# Altium PCB Taban.PcbDoc
Units mm, origin at the board's own origin, x right, y up, seen from the top; angles counter-clockwise.
Board outline 76.2 x 99 mm, 2 copper layers (Top Layer, Bottom Layer), stack 0.98 mm thick; 6 components, 0 nets, 6 pads, 0 vias.
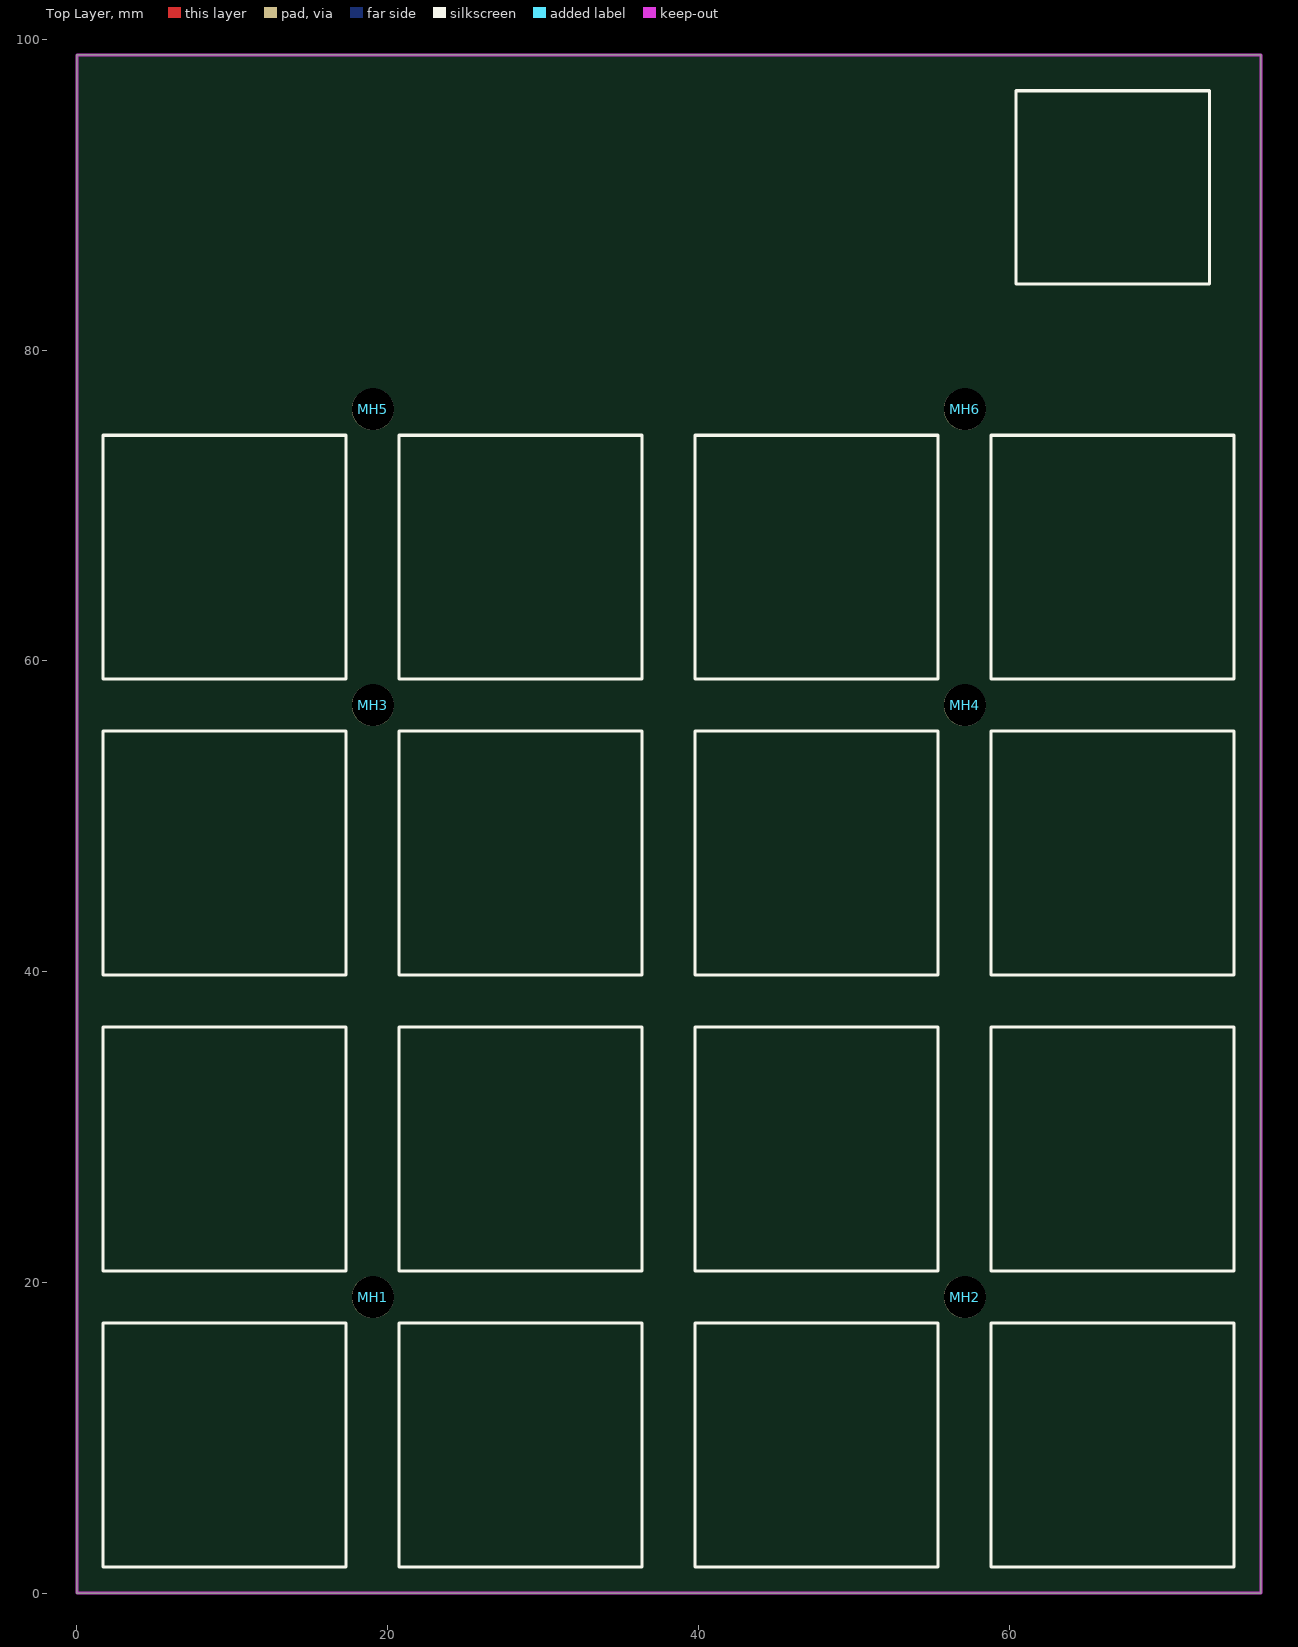
[diagram p0: Top Layer view]
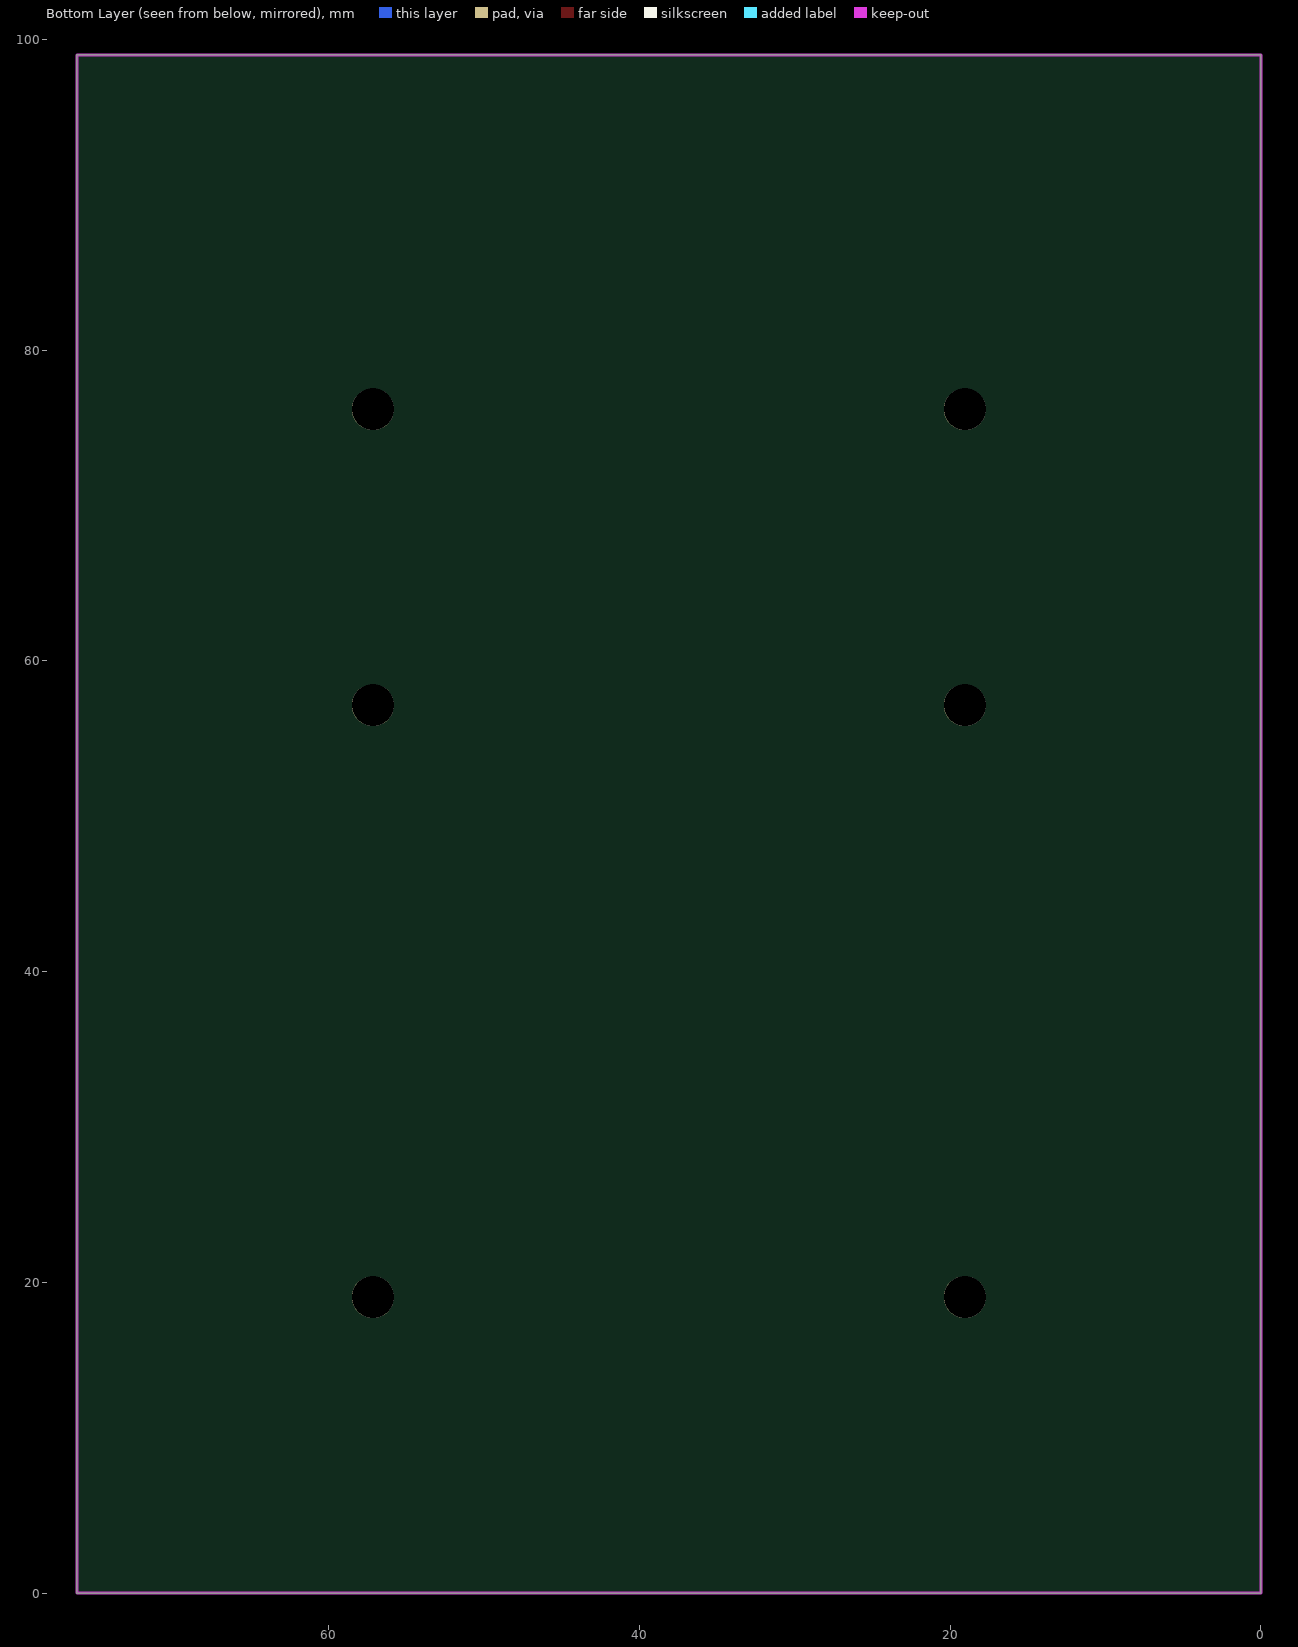
[diagram p1: Bottom Layer view, seen from below]

## Layer stack, top to bottom
Top Solder: solder mask 0.01, Solder Resist, Dk 3.5
Top Layer: signal copper 0.035
Dielectric 1: dielectric 0.91, FR-4, Dk 4.8
Bottom Layer: signal copper 0.035
Bottom Solder: solder mask 0.01, Solder Resist, Dk 3.5

## Board outline
0,0 0,99 76.2,99 76.2,0

## Design rules (kind name [scope] priority, off if disabled: settings)
Clearance [All] p1: gap=0.254 ignorepadtopadclearanceinfootprint=FALSE except(0: Arc-Hole Track-Hole SMDPad-Hole THPad-Hole Via-Hole Fill-Hole Poly-Hole Region-Hole Text-Hole)
PolygonConnect [All] p1: connectstyle=Relief reliefconductorwidth=0.254 reliefentries=4 polygonreliefangle="90 Angle" airgapwidth=0.254
RoutingVias [All] p1: holewidth=0.711 width=1.27 viastyle="Through Hole" minholewidth=0.711 minwidth=1.27 maxholewidth=0.711 maxwidth=1.27
SolderMaskExpansion [All] p1: expansion=0.102 istentingtop=FALSE
Width [All] p1: maxlimit=0.254 minlimit=0.254 preferedwidth=0.254
30 further rules are at their usual default settings.

## Components (designator, comment, footprint, x,y, rotation, side; value= is the part's Value field where it differs from the comment)
MH1 "MOUNTING HOLE" "MH 2.7MM" 19.049,19.05 r0 top
MH2 "MOUNTING HOLE" "MH 2.7MM" 57.149,19.05 r0 top
MH3 "MOUNTING HOLE" "MH 2.7MM" 19.049,57.15 r0 top
MH4 "MOUNTING HOLE" "MH 2.7MM" 57.149,57.15 r0 top
MH5 "MOUNTING HOLE" "MH 2.7MM" 19.049,76.2 r0 top
MH6 "MOUNTING HOLE" "MH 2.7MM" 57.149,76.2 r0 top

## Footprints (in the part's own frame and the unit in brackets; to place one, negate y for a bottom-side part, rotate by r counter-clockwise, add the part's x,y. Pads: shape width x height; smd on the part's side, far side on the other; paste and mask are expansions set on the pad)
"MH 2.7MM" [mm]
  round 2.7 hole 2.7 unplated mask+1.2: ""(0,0)

## Part data
MH1 MH2 MH3 MH4 MH5 MH6: library part MH

## Nets (pads, with @x,y where several pads share a name; then routed paths per layer and width w, separated by ;. In a path a pad name is that pad's centre, name@x,y a point inside that pad or via, vN(x,y) a via of type N, cw(c..) or ccw(c..) an arc to the next point about the centre after c; other vN are vias at no path point)
pads on no net: MH1. MH2. MH3. MH4. MH5. MH6.

## Keep-outs
Keep-Out Layer:
  the board outline again, w0.2

## Silkscreen, mask and mechanical layers (free items; w line width, h text height)
Top Overlay:
  lines w0.2: 1.675,1.675 17.325,1.675 17.325,17.375 1.675,17.375 1.675,1.675 ; 1.675,20.725 1.675,36.425 17.325,36.425 17.325,20.725 1.675,20.725 ; 1.675,39.775 1.675,55.475 17.325,55.475 17.325,39.775 1.675,39.775 ; 1.675,58.825 1.675,74.525 17.325,74.525 17.325,58.825 1.675,58.825 ; 20.725,1.675 20.725,17.375 36.375,17.375 36.375,1.675 20.725,1.675 ; 20.725,20.725 36.375,20.725 36.375,36.425 20.725,36.425 20.725,20.725 ; 20.725,39.775 36.375,39.775 36.375,55.475 20.725,55.475 20.725,39.775 ; 20.725,58.825 36.375,58.825 36.375,74.525 20.725,74.525 20.725,58.825 ; 39.775,1.675 39.775,17.375 55.425,17.375 55.425,1.675 39.775,1.675 ; 39.775,20.725 55.425,20.725 55.425,36.425 39.775,36.425 39.775,20.725 ; 39.775,39.775 55.425,39.775 55.425,55.475 39.775,55.475 39.775,39.775 ; 39.775,58.825 55.425,58.825 55.425,74.525 39.775,74.525 39.775,58.825 ; 58.825,1.675 58.825,17.375 74.475,17.375 74.475,1.675 58.825,1.675 ; 58.825,20.725 74.475,20.725 74.475,36.425 58.825,36.425 58.825,20.725 ; 58.825,39.775 74.475,39.775 74.475,55.475 58.825,55.475 58.825,39.775 ; 58.825,58.825 74.475,58.825 74.475,74.525 58.825,74.525 58.825,58.825 ; 60.45,84.25 60.45,96.7 72.9,96.7 72.9,84.25 60.45,84.25